# Altium PCB koruza-power-module-PCB.PcbDoc
Units mm, origin at the board's own origin, x right, y up, seen from the top; angles counter-clockwise.
Board outline 52.13 x 27.05 mm, 2 copper layers (Top Layer, Bottom Layer); 30 components, 12 nets, 65 pads, 69 vias.
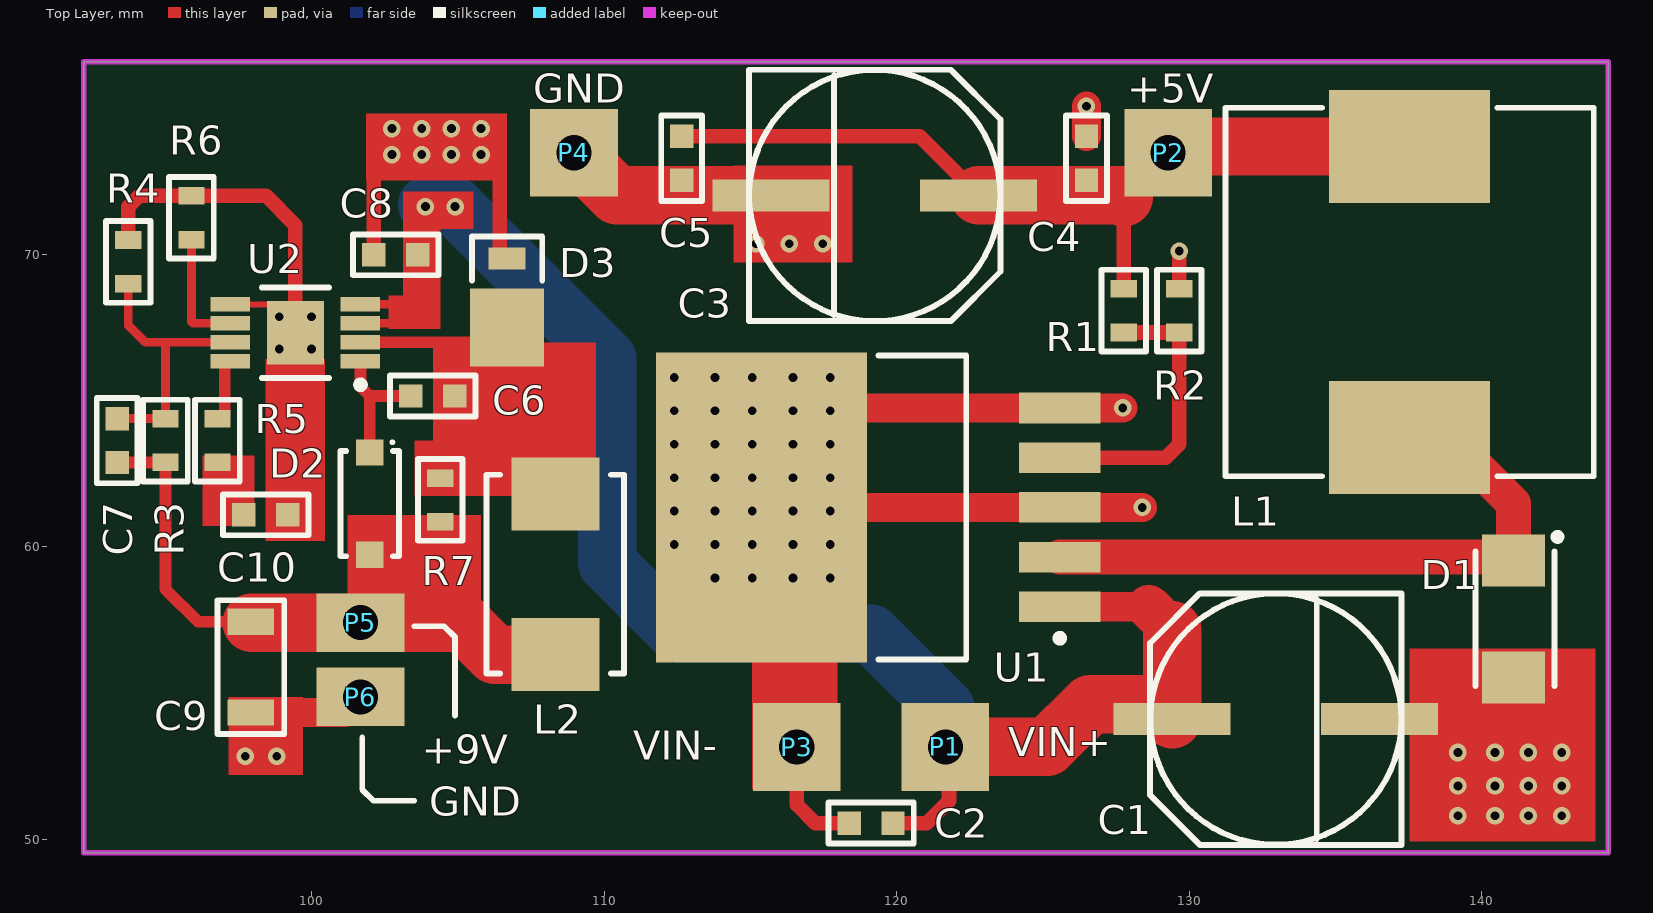
[diagram p0: Top Layer view]
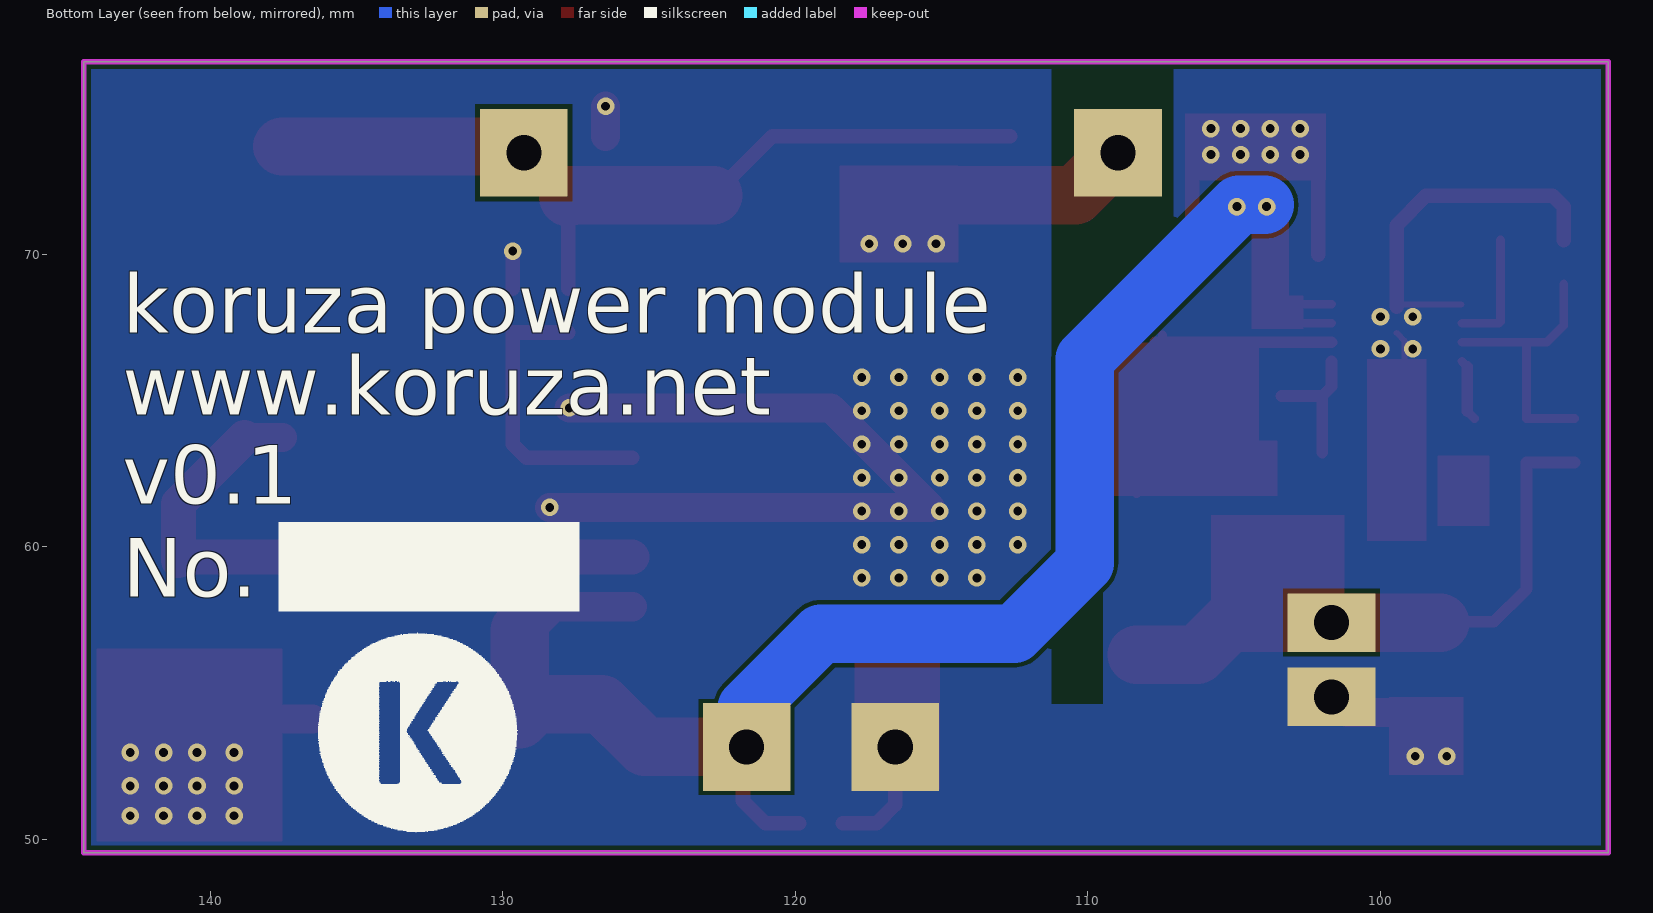
[diagram p1: Bottom Layer view, seen from below]
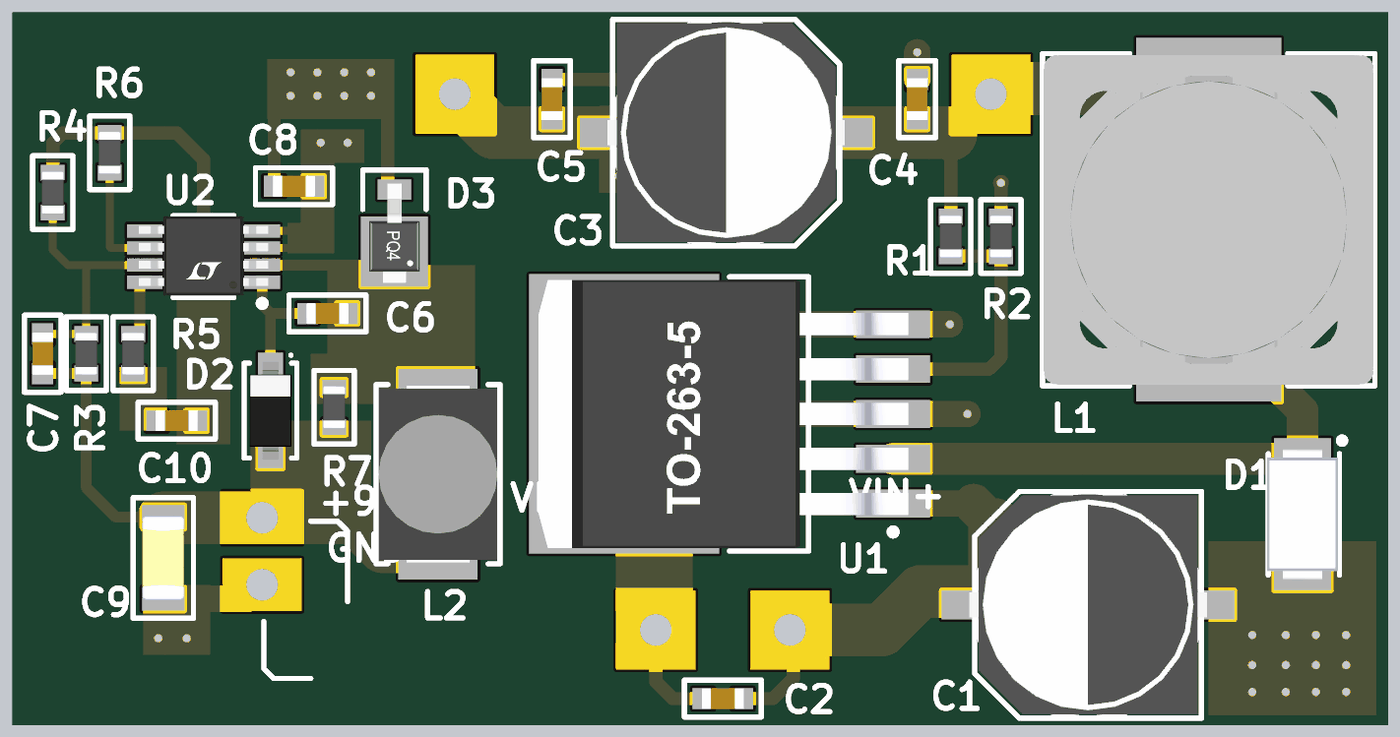
[diagram p2: 3D render of the assembled board from above, using the file's embedded part models]

## Layer stack, top to bottom
Top Solder: solder mask 0.0102, Solder Resist, Dk 3.5
Top Layer: signal copper 0.0356
Dielectric 1: dielectric 0.32, FR-4, Dk 4.8
Bottom Layer: signal copper 0.0356
Bottom Solder: solder mask 0.0102, Solder Resist, Dk 3.5

## Board outline
92.202,49.53 144.335,49.53 144.335,76.581 92.202,76.581

## Design rules (kind name [scope] priority, off if disabled: settings)
Clearance [All] p1: gap=0.152 except(0.03: SMDPad-SMDPad)
ComponentClearance [All] p1: gap=0 collisioncheckmode=3 verticalgap=0 showdistances=TRUE
DiffPairsRouting DiffPairsRouting_ETH [InDifferentialPairClass('ETH_100')] p1: maxlimit=0.213 minlimit=0.195 mostfreqgap=0.203 toplayer_minwidth=0.249 toplayer_maxwidth=0.274 toplayer_prefwidth=0.251 bottomlayer_mingap=0.203 bottomlayer_minwidth=0.249 bottomlayer_maxwidth=0.274 bottomlayer_prefwidth=0.251 maxuncoupledlength=12.7
DiffPairsRouting DiffPairsRouting_USB [InDifferentialPairClass('USB_90')] p2: maxlimit=0.254 minlimit=0.254 mostfreqgap=0.254 toplayer_minwidth=0.322 toplayer_maxwidth=0.347 toplayer_prefwidth=0.33 bottomlayer_minwidth=0.322 bottomlayer_maxwidth=0.347 bottomlayer_prefwidth=0.33 maxuncoupledlength=12.7
DiffPairsRouting [All] p3: maxlimit=0.254 minlimit=0.152 mostfreqgap=0.254 toplayer_minwidth=0.152 toplayer_maxwidth=0.381 toplayer_prefwidth=0.203 bottomlayer_minwidth=0.152 bottomlayer_maxwidth=0.381 bottomlayer_prefwidth=0.203 maxuncoupledlength=12.7
HoleSize [All] p1: absolutevalues=TRUE maxlimit=5 minlimit=0.1 maxpercent=80.000 minpercent=20.000
MatchedLengths camera [InDifferentialPairClass('CAMERA_DIFF')] p1: tolerance=0.254 checknetsindiffpair=TRUE checkdiffpairvsdiffpair=FALSE checkxsignals=FALSE checkothers=FALSE
MinimumSolderMaskSliver [All] p1: minsoldermaskwidth=0.05
PlaneConnect [All] p1: planeconnectstyle=Direct reliefexpansion=0.508 reliefentries=2 reliefconductorwidth=0.254 reliefairgap=0.254
PolygonConnect [All] p1: connectstyle=Direct reliefconductorwidth=0.254 reliefentries=4 polygonreliefangle="90 Angle" airgapwidth=0.254
RoutingVias [All] p1: holewidth=0.38 width=0.635 viastyle="Through Hole" minholewidth=0.3 minwidth=0.508 maxholewidth=0.711 maxwidth=1.27
SilkToSolderMaskClearance [IsPad] p1: minsilkscreentomaskgap=0 clearancetoexposedcopper=TRUE
SolderMaskExpansion [All] p1: expansion=0.102
Width [All] p1: maxlimit=2 minlimit=0.152 preferedwidth=0.203 minimp=50.000000 maximp=50.000000 favimp=50.000000
24 further rules are at their usual default settings.

## Components (designator, comment, footprint, x,y, rotation, side; value= is the part's Value field where it differs from the comment)
C1 "220uF /35V" "Cap Can F" 132.969,54.102 r180 top
C2 "100nF" CAP0603 119.126,50.546 r0 top
C3 "220uF /35V" "Cap Can F" 119.253,72.009 r0 top
C4 "100nF" CAP0603 126.492,73.279 r270 top
C5 "100nF" CAP0603 112.649,73.279 r90 top
C6 "100nF" CAP0603 104.14,65.151 r180 top
C7 "22pF" CAP0603 93.345,63.627 r270 top
C8 "1uF" CAP0603 102.87,69.977 r0 top
C9 "10uF /50V" CAP1206 97.917,55.88 r90 top
C10 "68pF" CAP0603 98.425,61.087 r180 top
D1 "SK34A-TP" SMC/DO-214AC 141.097,57.531 r270 top
D2 "1N4148W-7-F." SOD123 101.981,61.468 r270 top
D3 "MBRM140T1G" POWERMITE 106.68,67.499 r90 top
L1 "33uH" "IND DR125 SERIES" 137.541,68.707 r90 top
L2 "10 µH" INDP6545X29N 108.331,59.055 r270 top
P1 "Pin" PCBComponent_1#1 121.666,53.149 r0 top locked
P2 "Pin" PCBComponent_1#1 129.286,73.469 r0 top locked
P3 "Pin" PCBComponent_1#1 116.586,53.149 r0 top locked
P4 "Pin" PCBComponent_1#1 108.966,73.469 r0 top locked
P5 "Pin" PCBComponent_1#2 101.663,57.404 r0 top locked
P6 "Pin" PCBComponent_1#2 101.663,54.864 r0 top locked
R1 "12k" RES0603 127.762,68.072 r90 top
R2 "470R" RES0603 129.667,68.072 r270 top
R3 "105k" RES0603 94.996,63.627 r270 top
R4 "10k" RES0603 93.726,69.735 r270 top
R5 "69.8k" RES0603 96.774,63.627 r90 top
R6 "75k" RES0603 95.885,71.247 r270 top
R7 "1k" RES0603 104.394,61.595 r270 top
U1 "LM2596S-5.0/NOPB" KTT0005B 119.38,61.341 r180 top
U2 "LT3505EMS8E#PBF" MSOP8E 99.441,67.31 r180 top

## Footprints (in the part's own frame and the unit in brackets; to place one, negate y for a bottom-side part, rotate by r counter-clockwise, add the part's x,y. Pads: shape width x height; smd on the part's side, far side on the other; paste and mask are expansions set on the pad)
CAP0603 [mm]
  rect 0.8x0.8 smd: 1(-0.75,0) 2(0.75,0)
  silkscreen extent -1.46,-0.7 1.46,0.7, body extent -0.8,-0.4 0.8,0.4, height 0.9
CAP1206 [mm]
  rect 0.9x1.6 smd: 1(-1.55,0) 2(1.55,0)
  silkscreen extent -2.29,-1.14 2.29,1.14, body extent -1.6,-0.8 1.6,0.8, height 0.94
"Cap Can F" [mm]
  rect 4x1.1 smd: 1(3.55,0) 2(-3.55,0)
  silkscreen extent -4.3,-4.3 4.3,4.3, body extent -4.5,-4.15 4.5,4.15, height 11.9
"IND DR125 SERIES" [mm]
  rect 3.85x5.5 smd: 1(-4.975,0) 2(4.975,0)
  silkscreen extent -6.3,-6.3 6.3,6.3, body extent -6.25,-6.25 6.25,6.25, height 6.01
INDP6545X29N [mm] "Precision Wire Wound Inductor, 2-Leads, Body 6.50x4.50mm, IPC Medium Density"
  rect 2.5x3 smd: 1(-2.75,0) 2(2.75,0)
  silkscreen extent -3.4,-2.35 3.4,2.35, body extent -3.35,-2.25 3.35,2.25, height 3
KTT0005B [mm] "KTT Package  6-Pin TO-263"
  rect 2.8x1.05 smd: 1(-6.2,3.4) 2(-6.2,1.7) 3(-6.2,0) 4(-6.2,-1.7) 5(-6.2,-3.4)
  rect 7.2x10.6 smd: 6(4,0)
  silkscreen extent -6.32,-5.2 0,5.2, body extent -6.78,-5.08 7.24,5.08, height 4.56
MSOP8E [mm] "8-Lead Plastic MSOP"
  rect 1.35x0.5 smd: 1(-2.225,0.975) 2(-2.225,0.325) 3(-2.225,-0.325) 4(-2.225,-0.975) 5(2.225,-0.975) 6(2.225,-0.325) 7(2.225,0.325) 8(2.225,0.975)
  rect 1.94x2.17 smd: 9(0,0)
  silkscreen extent -2.35,-1.55 1.15,1.9, body extent -2.45,-1.52 2.45,1.48, height 0.86
PCBComponent_1#1 [mm]
  rect 3x3 hole 1.2: 1(0,0)
PCBComponent_1#2 [mm]
  rect 3x2 hole 1.2: 1(0,0)
POWERMITE [mm] "Diode"
  rect 2.67x2.54 smd: 1(0,0)
  rect 0.762x1.27 smd: 2(2.351,0)
  silkscreen extent 1.6,-1.2 3.1,1.2, body extent -1.18,-0.95 2.58,0.95, height 1.02
RES0603 [mm]
  rect 0.6x0.9 smd: 1(-0.75,0) 2(0.75,0)
  silkscreen extent -1.4,-0.76 1.4,0.76, body extent -0.8,-0.42 0.8,0.42, height 0.8
SMC/DO-214AC [mm]
  rect 1.78x2.16 smd: 1(-2,0) 2(2,0)
  silkscreen extent -2.91,-1.3 2.3,1.61, body extent -2.5,-1.35 2.5,1.35, height 2.21
SOD123 [mm] "SODFL, 2-Leads, Body 1.55x3.70mm, IPC Medium Density"
  rect 0.9x0.95 smd: 1(-1.75,0) 2(1.75,0)
  silkscreen extent -2.15,-1 1.8,1, body extent -1.85,-0.8 1.85,0.8, height 1.27

## Part data
C1 C3: "PANASONIC ELECTRONIC COMPONENTS - EEEFK1V221P - CAP, ALU ELEC, 220UF, 35V, SMD"
C2 C4 C5 C6: "MURATA - GRM188R71C104KA01J - CAP, MLCC, X7R, 0.1UF, 16V, 0603"
C7: "MURATA - GRM1885C1H220JA01D - CAP, MLCC, C0G/NP0, 22PF, 50V, 0603"
C8: "MURATA - GRM188R61H105KAALD - CAP, MLCC, X5R, 1UF, 50V, 0603"
C9: "MURATA - GRM31CR61H106KA12L - CAP, MLCC, X5R, 10UF, 50V, 1206"
C10: "MURATA - GRM1885C1H680JA01D - CAP, MLCC, C0G/NP0, 68PF, 50V, 0603"
D1: "MICRO COMMERCIAL COMPONENTS - SK34A-TP - SCHOTTKY RECTIFIERS, 3A, 40V, DO-214AC"
D2: "DIODES INC. - 1N4148W-7-F. - DIODE, SWITCH, 300MA, 100V,SOD123"
D3: "ON SEMICONDUCTOR - MBRM140T1G - DIODE, SCHOTTKY, 1A, POWERMITE"
L1: "COILTRONICS - DR125-330-R - INDUCTOR, SMD, 33UH, 3.28A"
L2: library part SDR0703-100KL, "BOURNS - SDR0703-100KL - INDUCTOR, POWER, 10UH, 10%, 1A"
P1 P2 P3 P4 P5 P6: "Pin for board to board connection"
R1: "MULTICOMP - MC0063W0603112K - RES, THICK FILM, 12K, 1%, 0.063W, 0603"
R2: "MULTICOMP - MCMR06X471 JTL - RES, CERAMIC, 470R, 5%, 0.1W, 0603"
R3: "MULTICOMP - MC0063W06031105K - RES, THICK FILM, 105K, 1%, 0.063W, 0603"
R4: "MULTICOMP - MCMR06X103 JTL - RES, CERAMIC, 10K, 5%, 0.1W, 0603"
R5: "MULTICOMP - MC0063W0603169K8 - RES, THICK FILM, 69K8, 1%, 0.063W, 0603"
R6: "MULTICOMP - MCSR06X7502FTL - RES, CERAMIC, 75K, 1%, 0.1W, 0603"
R7: "MULTICOMP - MCMR06X102 JTL - RES, CERAMIC, 1K, 5%, 0.1W, 0603"
U1: "TEXAS INSTRUMENTS - LM2596S-5.0/NOPB - IC, DC/DC CONVERTER, 3A"
U2: "LINEAR TECHNOLOGY - LT3505EMS8E#PBF - IC, SW REG, 1.2A, STEP D, 8MSOP"

## Via types
v1: diameter 0.6, hole 0.3, Top Layer to Bottom Layer, 38 vias
v2: diameter 0.6, hole 0.3, Top Layer to Bottom Layer, tented both sides, 31 vias

## Nets (pads, with @x,y where several pads share a name; then routed paths per layer and width w, separated by ;. In a path a pad name is that pad's centre, name@x,y a point inside that pad or via, vN(x,y) a via of type N, cw(c..) or ccw(c..) an arc to the next point about the centre after c; other vN are vias at no path point)
GND: C1.2 C2.1 C3.2 C4.1 C5.1 C8.1 C9.1 C10.1 D1.2 D3.2 P3.1 P4.1 P6.1 R2.1 R4.1 R6.1 U1.3 U1.5 U1.6 U2.5 U2.9 | length 78.6
  Top Layer w0.203: U2.5 99.355,68.285 U2.9@99.441,68.199 ; C10.1 99.175,67.044 U2.9 ; P6.1@101.13,54.33 P6.1
  Top Layer w0.5: R4.1 93.726,71.628 94.095,71.997 R6.1 98.437,71.997 99.441,70.993 U2.9@99.441,68.199 ; C8.1 102.12,72.91 102.235,73.025 106.045,73.025 106.426,72.644 106.426,70.104 D3.2 ; P3.1 116.586,51.181 117.221,50.546 C2.1 ; R2.1 v2(129.667,70.104)
  Top Layer w1: v2(97.727,52.832) 97.79,52.832 97.917,52.705 C9.1 P6.1@101.13,54.33 ; C4.1 v2(126.492,75.057) ; v2(127.733,64.741) U1.5 118.78,64.741 U1.6 U1.3 v2(128.397,61.341) ; C1.2 138.049,54.102 v2(139.192,52.959)
  Top Layer w2: P4.1 110.426,72.009 C3.2
  other v1: 113.792,58.928 115.062,58.928 116.459,58.928 117.729,58.928 112.395,60.071 113.792,60.071 115.062,60.071 116.459,60.071 117.729,60.071 112.395,61.214 113.792,61.214 115.062,61.214 116.459,61.214 117.729,61.214 112.395,62.357 113.792,62.357 115.062,62.357 116.459,62.357 117.729,62.357 112.395,63.5 113.792,63.5 115.062,63.5 116.459,63.5 117.729,63.5 112.395,64.643 113.792,64.643 115.062,64.643 116.459,64.643 117.729,64.643 112.395,65.786 113.792,65.786 115.062,65.786 116.459,65.786 117.729,65.786 98.891,66.76 99.991,66.76 98.891,67.86 99.991,67.86
  other v2: 139.192,50.8 140.462,50.8 141.605,50.8 142.748,50.8 139.192,51.816 140.462,51.816 141.605,51.816 142.748,51.816 98.806,52.832 140.462,52.959 141.605,52.959 142.748,52.959 115.189,70.358 116.332,70.358 117.475,70.358 102.743,73.406 103.759,73.406 104.775,73.406 105.791,73.406 102.743,74.295 103.759,74.295 104.775,74.295 105.791,74.295
NetC6_1: C6.1 D3.1 L2.1 R7.1 U2.2 | length 17.8
  Top Layer w0.3: R7.1 104.89,62.841 C6.1 107.696,65.151 107.442,65.405 ; D3.1@107.442,67.245 107.442,65.405 ; L2.1 107.95,62.186 107.442,65.405
  Top Layer w0.4: U2.2 D3.1@107.69,66.985
NetC6_2: C6.2 D2.1 U2.1 | length 4.7
  Top Layer w0.4: U2.1 101.666,65.466 101.981,65.151 ; D2.1 101.981,65.151 ; C6.2 101.981,65.151
NetC7_1: C7.1 R3.1 R4.2 U2.7 | length 9.4
  Top Layer w0.3: C7.1 R3.1 94.996,66.929 ; R4.2 93.726,67.564 94.305,66.985 U2.7
NetC10_2: C10.2 R5.1 | length 2.2
  Top Layer w0.203: R5.1 96.774,61.988 C10.2
NetD1_1: D1.1 L1.1 U1.2 | length 22
  Top Layer w1: L1.1 L1.1@138.833,63.732 ; D1.1@140.987,59.641 D1.1
  Top Layer w1.2: U1.2 D1.1@140.987,59.641 ; L1.1@138.833,63.732 141.097,61.468 D1.1
NetR1_1: R1.1 R2.2 U1.4 | length 10
  Top Layer w0.5: U1.4 129.208,63.041 129.667,63.5 R2.2 R1.1
NetR5_2: R5.2 U2.8 | length 2.1
  Top Layer w0.3: R5.2 R5.2@97.028,64.631 ; U2.8@97.028,66.147 U2.8
  Top Layer w0.4: R5.2@97.028,64.631 U2.8@97.028,66.147
NetR6_2: R6.2 U2.6 | length 4.2
  Top Layer w0.3: R6.2 95.885,67.691 95.941,67.635 U2.6
PWR_IN+: C1.1 C2.2 C8.2 P1.1 U1.1 U2.3 U2.4 | length 58.3
  Top Layer w0.3: U2.3 103.449,67.635 103.771,67.957 103.771,68.338 ; U2.4 103.718,68.285 103.771,68.338 ; v2(103.886,71.628) 103.771,71.513 103.771,68.338
  Top Layer w0.5: C2.2 121.031,50.546 121.793,51.308 121.793,53.023 P1.1
  Top Layer w1: U1.1 128.622,57.941
  Top Layer w1.5: 128.622,57.941 129.419,57.144
  Top Layer w2: P1.1 125.158,53.149 126.619,54.61 128.911,54.61 C1.1 129.419,57.144
  Bottom Layer w2: v2@103.95,71.691 104.838,71.691 110.109,66.421 110.109,59.436 112.522,57.023 119.126,57.023 121.666,54.483 P1.1
  other v2: 104.902,71.628
PWR_OUT_+5V: C3.1 C4.2 C5.2 L1.2 P2.1 R1.2 | length 29.5
  Top Layer w0.5: C5.2 120.783,74.029 C3.1 ; R1.2 127.762,71.945 ; P2.1@127.825,72.009 P2.1
  Top Layer w2: C3.1 127.762,72.009 127.762,71.945 ; P2.1 129.499,73.682 L1.2
PWR_OUT_+9V: C7.2 C9.2 D2.2 L2.2 P5.1 R3.2 R7.2 | length 25.6
  Top Layer w0.4: C7.2 R3.2 94.996,58.547 96.113,57.43 C9.2 C9.2@97.943,57.404 ; P5.1 101.981,57.721 D2.2 103.108,60.845 R7.2
  Top Layer w2: C9.2@97.943,57.404 P5.1 105.156,57.404 106.255,56.305 L2.2

## Polygon pours and split planes (outlines as drawn)
GND on Bottom Layer "GND_B" (solid, pour order 0): 92.202,49.53 144.335,49.53 144.335,76.581 92.202,76.581

## Keep-outs
Keep-Out Layer:
  the board outline again, w0.2

## Other copper
Top Layer:
  rectangle net GND: 114.427,69.723 118.491,73.025
  rectangle net GND: 97.155,52.197 99.695,54.864
  rectangle net GND: 137.541,49.911 143.891,56.515
  rectangle net NetC10_2: 96.266,60.706 98.044,63.119
  rectangle net GND: 98.425,60.198 100.457,66.421
  rectangle net GND: 115.062,51.689 117.983,57.15
  rectangle net GND: 101.854,72.517 106.68,74.803
  rectangle net PWR_OUT_+9V: 101.219,57.785 105.791,61.087
  rectangle net NetC6_1: 103.505,61.722 104.267,63.627
  rectangle net NetC6_1: 104.14,61.722 106.68,67.183
  rectangle net NetC6_1: 105.156,61.722 109.728,66.985
  rectangle net PWR_IN+: 104.394,70.866 105.537,72.136
  rectangle net PWR_IN+: 103.124,68.58 104.394,72.136
  rectangle net PWR_IN+: 102.616,67.437 104.394,68.58
  pour cut-out: 100.33,73.025 92.71,73.025 92.71,67.31 98.425,67.31 98.425,68.453 100.33,68.453
  pour cut-out: 109.474,76.581 111.252,76.581 111.252,54.61 109.474,54.61
Bottom Layer:
  pour cut-out: 107.061,76.581 111.252,76.581 111.252,54.61 109.474,54.61 109.474,68.707 107.061,71.12

## Silkscreen, mask and mechanical layers (free items; w line width, h text height)
Top Overlay:
  lines w0.2: 101.727,53.467 101.727,51.689 102.108,51.308 103.505,51.308 ; 103.505,57.277 104.521,57.277 104.902,56.896 104.902,54.229
  text "GND" at 107.569,75.184 h1
  text "+5V" at 127.889,75.184 h1
  text "VIN+" at 123.825,52.832 h1
  text "VIN-" at 110.998,52.705 h1
  text "+9V" at 103.759,52.578 h1
  text "GND" at 104.013,50.8 h1
Bottom Overlay:
  drawing of 590 lines, arcs and shapes, not listed
  text "koruza power module" at 143.002,67.31 h2
  text "www.koruza.net" at 143.002,64.516 h2
  text "v0.1" at 143.002,61.468 h2
  text "No." at 143.002,58.293 h2